# Altium PCB PIC16F_PCB.PcbDoc
Units mil, origin at the board's own origin, x right, y up, seen from the top; angles counter-clockwise.
Board outline 905 x 1620 mil, 2 copper layers (Top Layer, Bottom Layer); 8 components, 29 nets, 69 pads, 0 vias.
Unrouted connection lines stored in the file: 1.
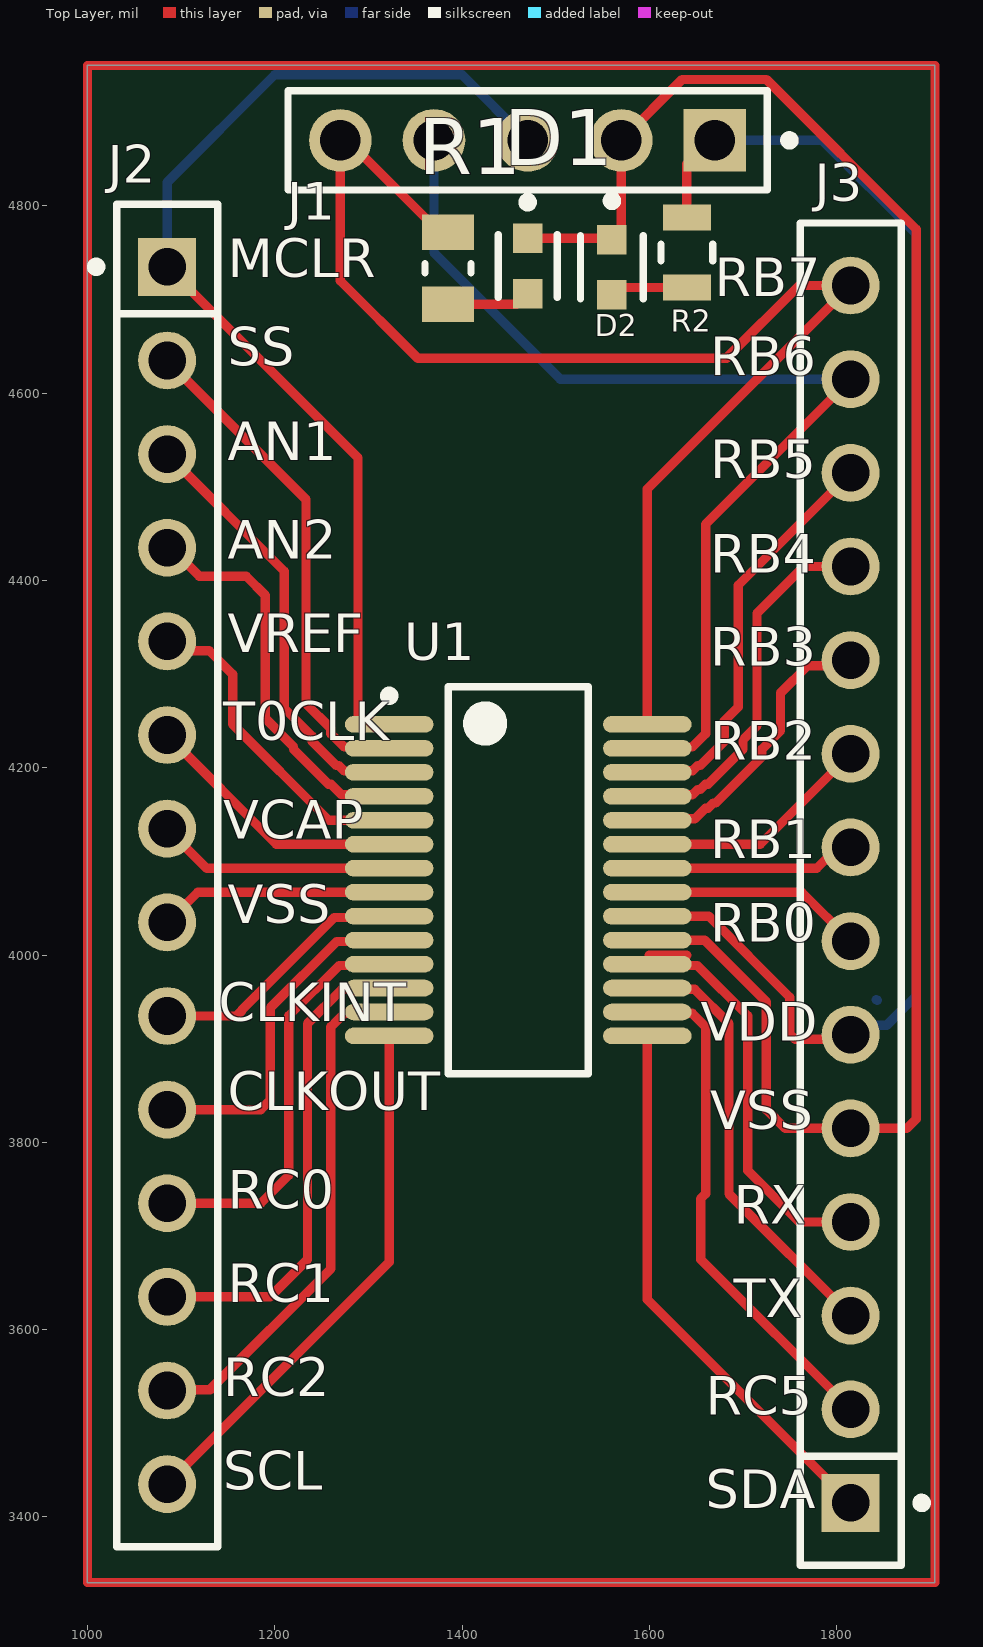
[diagram p0: Top Layer view]
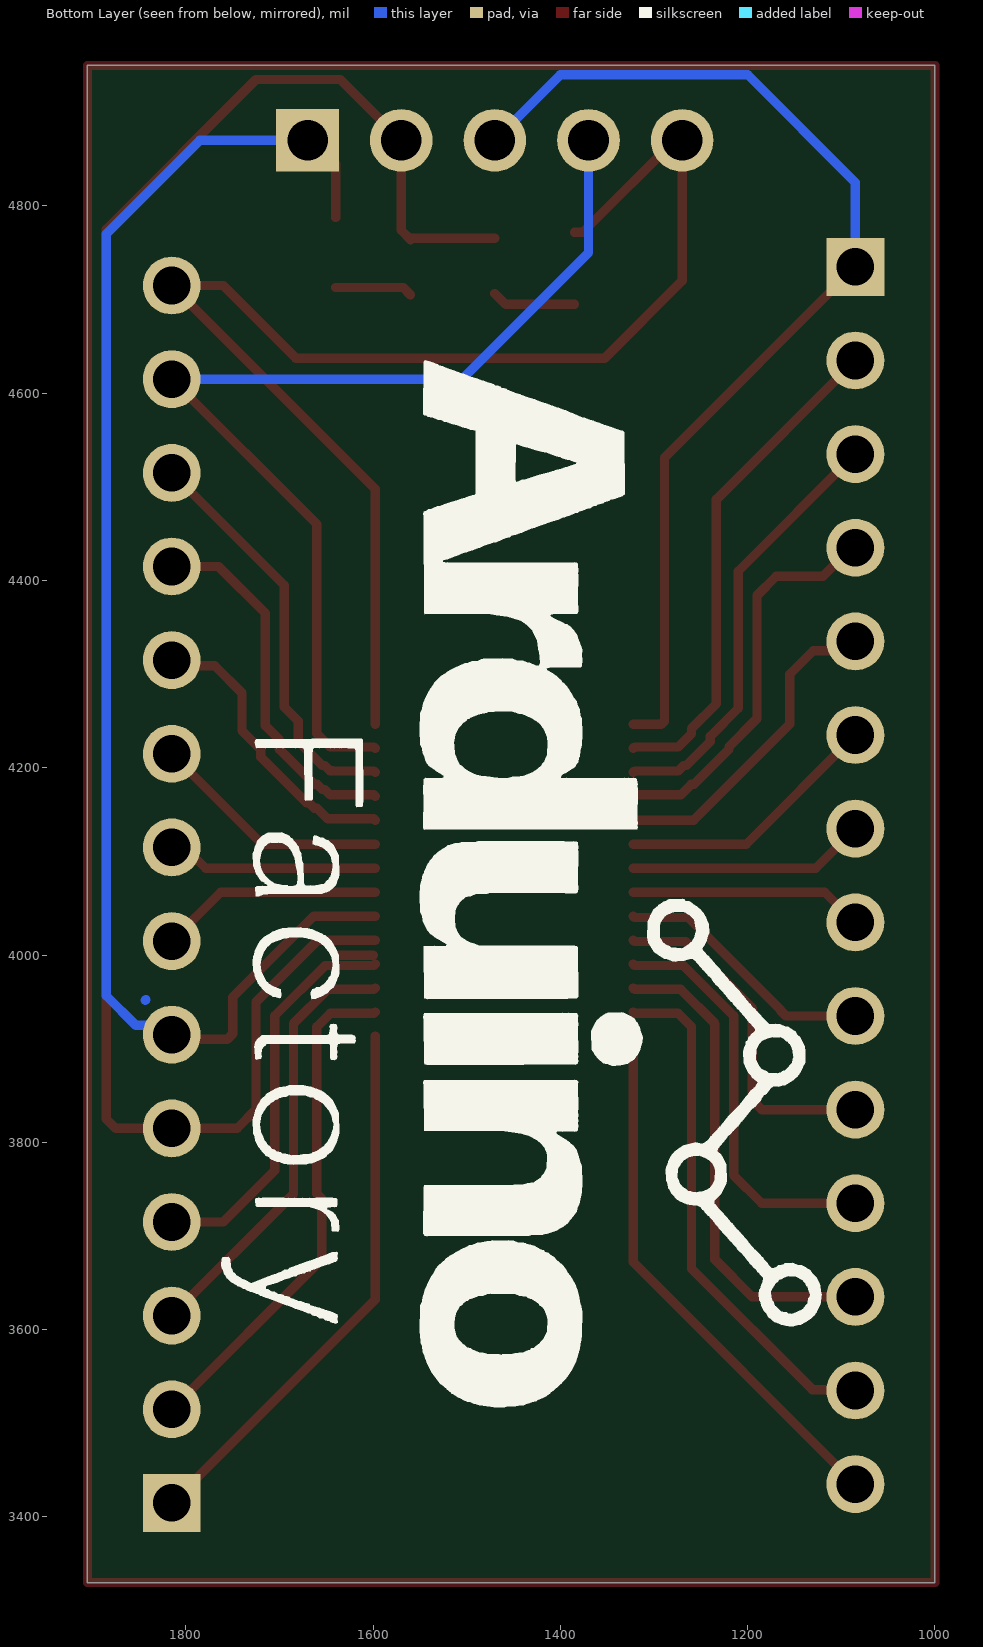
[diagram p1: Bottom Layer view, seen from below]
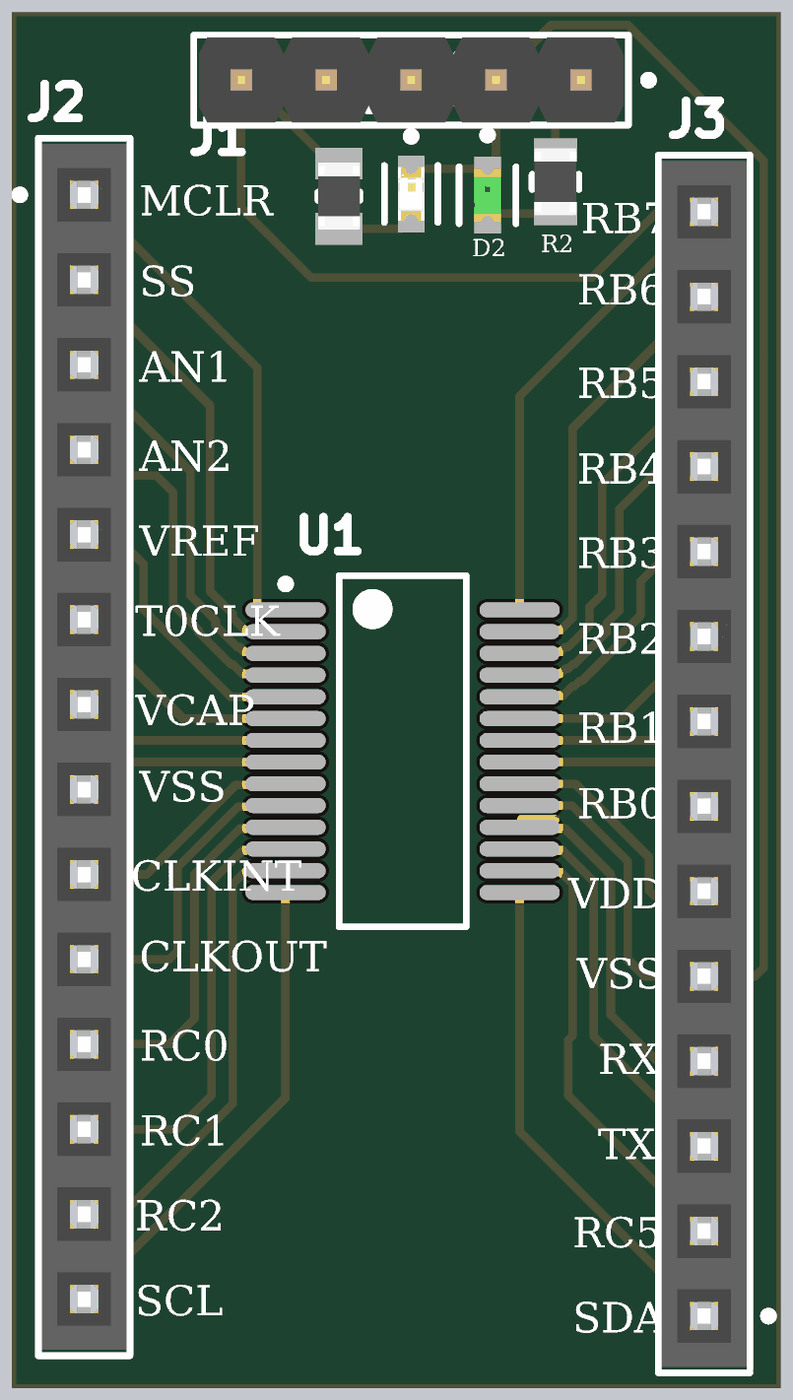
[diagram p2: 3D render of the assembled board from above, using the file's embedded part models]

## Layer stack, top to bottom
Top Solder: solder mask 0.4, Solder Resist, Dk 3.5
Top Layer: signal copper 1.4
Dielectric 1: dielectric 12.6, FR-4, Dk 4.8
Bottom Layer: signal copper 1.4
Bottom Solder: solder mask 0.4, Solder Resist, Dk 3.5

## Board outline
1000,3330 1000,4950 1905,4950 1905,3330

## Design rules (kind name [scope] priority, off if disabled: settings)
Clearance [All] p1: gap=10 ignorepadtopadclearanceinfootprint=FALSE
PolygonConnect [All] p1: connectstyle=Relief reliefconductorwidth=10 reliefentries=4 polygonreliefangle="90 Angle" airgapwidth=10
RoutingVias [All] p1: holewidth=28 width=50 viastyle="Through Hole" minholewidth=28 minwidth=50 maxholewidth=28 maxwidth=50
SolderMaskExpansion [All] p1: expansion=4 istentingtop=FALSE
Width [All] p1: maxlimit=10 minlimit=10 preferedwidth=10
30 further rules are at their usual default settings.

## Components (designator, comment, footprint, x,y, rotation, side; value= is the part's Value field where it differs from the comment)
D1 "LO_Q976-PS-25-0-20-R18" Osram_Opto_LO_Q976_MFG 1470,4736 r270 top
D2 "LTST-C190GKT" Lite-On_0_MFG 1560,4734.53 r270 top
J1 "61300511121" Wurth_61300511121_0 1470,4870 r180 top
J2 "PPTC141LFBN-RC" Sullins_0_MFG 1085,4085 r270 top
J3 "PPTC141LFBN-RC" Sullins_0_MFG 1815,4065 r90 top
R1 "RMCF0603FT220R" Yageo_RC0805_IPC_B 1385,4733.42 r270 top
R2 "RMCF0603FT220R" Yageo_RC0805_MFG 1640,4750.28 r90 top
U1 "PIC16F722AT-I/SS" MCHP-SSOP-SS28_M 1460,4080 r0 top

## Footprints (in the part's own frame and the unit in brackets; to place one, negate y for a bottom-side part, rotate by r counter-clockwise, add the part's x,y. Pads: shape width x height; smd on the part's side, far side on the other; paste and mask are expansions set on the pad)
Lite-On_0_MFG [mm]
  rect 0.8x0.8 smd paste+0 mask+0: 1(-0.75,0) 2(0.75,0)
  silkscreen extent -1.92,-0.85 0.85,0.85, body extent -1.25,-0.55 1.25,0.55, height 0.25
MCHP-SSOP-SS28_M [mm] "SOP, 28-Leads, Body 10.2x5.3mm, Pitch 0.65mm, IPC Low Density"
  oval 2.4x0.45 smd: 1(-3.5,4.225) 2(-3.5,3.575) 3(-3.5,2.925) 4(-3.5,2.275) 5(-3.5,1.625) 6(-3.5,0.975) 7(-3.5,0.325) 8(-3.5,-0.325) 9(-3.5,-0.975) 10(-3.5,-1.625) 11(-3.5,-2.275) 12(-3.5,-2.925) 13(-3.5,-3.575) 14(-3.5,-4.225) 15(3.5,-4.225) 16(3.5,-3.575) 17(3.5,-2.925) 18(3.5,-2.275) 19(3.5,-1.625) 20(3.5,-0.975) 21(3.5,-0.325) 22(3.5,0.325) 23(3.5,0.975) 24(3.5,1.625) 25(3.5,2.275) 26(3.5,2.925) 27(3.5,3.575) 28(3.5,4.225)
  silkscreen extent -3.62,-5.25 1.9,5.25, body extent -2.8,-5.25 2.8,5.25, height 2
Osram_Opto_LO_Q976_MFG [mm]
  rect 0.8x0.8 smd paste+0 mask+0: 1(-0.75,0) 2(0.75,0)
  silkscreen extent -1.85,-0.8 0.85,0.8, body extent -1.25,-0.52 1.25,0.52, height 0.25
Sullins_0_MFG [mm]
  rect 1.57x1.57 hole 1.02 paste-2539.97 mask+0: 1(-16.51,0)
  round 1.57 hole 1.02 paste-2539.97 mask+0: 2(-13.97,0) 3(-11.43,0) 4(-8.89,0) 5(-6.35,0) 6(-3.81,0) 7(-1.27,0) 8(1.27,0) 9(3.81,0) 10(6.35,0) 11(8.89,0) 12(11.43,0) 13(13.97,0) 14(16.51,0)
  silkscreen extent -18.21,-2.05 18.21,1.37, body extent -18.31,-1.47 18.31,1.47, height 0.25
Wurth_61300511121_0 [mm]
  rect 1.7x1.7 hole 1.1 paste-2539.97 mask+0: 1(-5.08,0)
  round 1.7 hole 1.1 paste-2539.97 mask+0: 2(-2.54,0) 3(0,0) 4(2.54,0) 5(5.08,0)
  silkscreen extent -7.23,-1.35 6.5,1.35, body extent -6.6,-1.45 6.6,1.45, height 0.25
Yageo_RC0805_IPC_B [mil]
  rect 37.66x55.44 smd paste+0 mask+0: 1(-38.42,0) 2(38.42,0)
  silkscreen extent -5,-25 5,25, body extent -67,-38 67,38, height 10
Yageo_RC0805_MFG [mm]
  rect 0.7x1.3 smd paste+0 mask+0: 1(-0.95,0) 2(0.95,0)
  silkscreen extent -0.23,-0.7 0.23,0.7, body extent -1.4,-0.8 1.4,0.8, height 0.25

## Part data
U1: "Flash Microcontroller with nanoWatt XLP Technology, 20 MHz, 24 I/O, -40 to 85 degC, 28-pin SSOP (SS28), Tape and Reel", Manufacturer=Microchip, Operation Voltage Range="1.8V - 5.5V", # of A/D Channels=11, ComponentLink1Description=Datasheet, ComponentLink1URL=http://ww1.microchip.com/downloads/en/DeviceDoc/41417B.pdf, ComponentLink2Description="Package Specification", ComponentLink2URL=http://www.microchip.com/stellent/groups/techpub_sg/documents/packagingspec/en012702.pdf, ComponentLink3Description="URL Link1", ComponentLink3URL="Product URL:http://www.microchip.com/datasheet/PIC16F722A", DatasheetVersion="Rev. B", Digital Communication="1 -A/E/USART, 1 -SSP(SPI/I2C)", I/O Pins=24, Internal Oscillator="16 MHz, 500 kHz", Max. CPU Speed MHz=20, Memory Type=Flash, Mounting Technology="Surface Mount", PackageDescription="28-Lead Plastic Shrink Small Outline, 10.2 x 5.3 mm Body, 0.65 mm Pitch", PackageReference=SSOP-SS28, PackageVersion="C04-073B, 12/2012", Packing=T/R, PartNumber=PIC16F722AT-I/SS, Program Memory KBytes=3.5, Program Memory KWords=2, RAM=128, RoHS=TRUE, Timers="2 - 8-bit, 1 - 16-bit, 0 - 32-bit"

## Nets (pads, with @x,y where several pads share a name; then routed paths per layer and width w, separated by ;. In a path a pad name is that pad's centre, name@x,y a point inside that pad or via, vN(x,y) a via of type N, cw(c..) or ccw(c..) an arc to the next point about the centre after c; other vN are vias at no path point)
\MCLR: J1.3 J2.1 U1.1 | length 1156
  Top Layer w10: J2.1 1288.82,4531.18 1288.82,4249.9 1292.38,4246.34 U1.1
  Bottom Layer w10: J2.1 1085,4825 1200,4940 1400,4940 J1.3
\SS: J2.2 U1.2 | length 539.8
  Top Layer w10: J2.2 1233.4,4486.6 1233.4,4268.4 1259.96,4241.84 1259.96,4236.46 1274.19,4222.22 1320.73,4222.22 U1.2
AN1: J2.3 U1.3 | length 466.9
  Top Layer w10: J2.3 1210,4410 1210,4263.52 1239.96,4233.56 1239.96,4228.17 1265.65,4202.48 1268.35,4202.48 1274.19,4196.63 1320.73,4196.63 U1.3
AN2: J2.4 U1.4 | length 425.8
  Top Layer w10: J2.4 1089.15,4435 1119.53,4404.61 1169.53,4404.61 1190,4384.14 1190,4252.54 1219.96,4222.58 1219.96,4219.89 1257.37,4182.48 1260.06,4182.48 1271.5,4171.04 1320.73,4171.04 U1.4
CLKIN: J2.9 U1.9 | length 281.9
  Top Layer w10: J2.9 1159.14,3935 1165,3940.86 1165,3941.72 1263.42,4040.14 1320.73,4040.14 U1.9
CLKOUT: J2.10 U1.10 | length 369.8
  Top Layer w10: J2.10 1185,3835 1195,3845 1195,3943.44 1266.11,4014.55 1320.73,4014.55 U1.10
NetD1_2: D1.2 R1.2 | length 89.8
  Top Layer w10: R1.2 1458.52,4695 D1.2
NetD2_2: D2.2 R2.1 | length 83.3
  Top Layer w10: D2.2 1567.87,4712.87 R2.1
RB0: J3.7 U1.21 | length 238.8
  Top Layer w10: U1.21 1762.8,4067.2 J3.7
RB1: J3.8 U1.22 | length 226.4
  Top Layer w10: U1.22 1778.78,4092.8 1800.98,4115 J3.8
RB2: J3.9 U1.23 | length 257.2
  Top Layer w10: U1.23 1718.39,4118.39 J3.9
RB3: J3.10 U1.24 | length 316.4
  Top Layer w10: U1.24 1599.27,4145.45 1648.5,4145.45 1659.94,4156.89 1662.63,4156.89 1668.22,4162.48 1670.92,4162.48 1720.04,4211.6 1720.04,4219.68 1740,4239.65 1740,4280 1769.09,4309.09 1809.09,4309.09 J3.10
RB4: J3.11 U1.25 | length 395.1
  Top Layer w10: U1.25 1599.27,4171.04 1645.81,4171.04 1651.65,4176.89 1654.35,4176.89 1659.94,4182.48 1662.63,4182.48 1700.04,4219.89 1700.04,4230.04 1715,4245 1715,4365 1765,4415 J3.11
RB5: J3.12 U1.26 | length 438.6
  Top Layer w10: U1.26 1599.27,4196.63 1643.11,4196.63 1643.37,4196.89 1646.06,4196.89 1651.65,4202.48 1654.35,4202.48 1680.04,4228.17 1680.04,4250.04 1695,4265 1695,4395 J3.12
RB6: J1.4 J3.13 U1.27 | length 1132.4
  Top Layer w10: U1.27 1599.27,4222.22 1645.81,4222.22 1660.04,4236.46 1660.04,4460.04 J3.13
  Bottom Layer w10: J1.4 1370,4750 1505,4615 J3.13
RB7: J1.5 J3.14 R1.1 U1.28 | length 1473.2
  Top Layer w10: J1.5 1270,4720 1352.5,4637.5 1682.5,4637.5 1760,4715 J3.14 1597.8,4497.8 U1.28 ; J1.5@1273.97,4873.97 1376.11,4771.84 R1.1
RC0: J2.11 U1.11 | length 442.7
  Top Layer w10: J2.11 1185,3735 1215,3765 1215,3935.15 1268.81,3988.96 1320.73,3988.96 U1.11
RC1: J2.12 U1.12 | length 521.4
  Top Layer w10: J2.12 1195,3635 1235,3675 1235,3926.87 1271.5,3963.37 1320.73,3963.37 U1.12
RC2: J2.13 U1.13 | length 556.1
  Top Layer w10: J2.13 1085.98,3535.98 1130.91,3535.98 1259.96,3665.04 1259.96,3923.54 1274.19,3937.78 1320.73,3937.78 U1.13
RC5: J3.2 U1.16 | length 545.7
  Top Layer w10: U1.16 1599.27,3937.78 1645.81,3937.78 1660.04,3923.54 1660.04,3745.04 1655,3740 1655,3675 J3.2
RX: J3.4 U1.18 | length 428
  Top Layer w10: U1.18 1599.27,3988.96 1651.19,3988.96 1705,3935.15 1705,3770 1760,3715 J3.4
SCL: J2.14 U1.14 | length 576.9
  Top Layer w10: J2.14 1322.2,3672.2 U1.14
SDA: J3.1 U1.15 | length 588.6
  Top Layer w10: U1.15 1597.8,3632.2 J3.1
T0CKI: J2.6 U1.6 | length 285.5
  Top Layer w10: J2.6 1201.61,4118.39 U1.6
TX: J3.3 U1.17 | length 468.6
  Top Layer w10: U1.17 1599.27,3963.37 1648.5,3963.37 1685,3926.87 1685,3745 J3.3
VCAP: J2.7 U1.7 | length 254.7
  Top Layer w10: J2.7 1127.2,4092.8 U1.7
VDD: J1.1 J3.6 R2.2 U1.20 | length 1553.5
  Top Layer w10: U1.20 1663.39,4041.61 1750,3955 1750,3915.86 1755.86,3910 1810,3910 J3.6 ; R2.2 1640,4845 J1.1@1670,4875
  Bottom Layer w10: J1.1 1785,4870 1885,4770 1885,3956.72 1853.2,3924.91 1824.91,3924.91 J3.6
VREF: J2.5 U1.5 | length 347.5
  Top Layer w10: J2.5 1094.91,4325.09 1129.91,4325.09 1155,4300 1155,4246.72 1257.74,4143.98 U1.5
VSS: D1.1 D2.1 J1.2 J2.8 J3.5 U1.8 U1.19 | length 2251.4
  Top Layer w10: J2.8 1085.51,4035 1117.72,4067.2 U1.8 ; D1.1 1558.52,4765.53 D2.1 1570,4774.06 J1.2 1635,4935 1725,4935 1885,4775 1885,3825 1875,3815 J3.5 1745,3815 1725,3835 1725,3950 1658.98,4016.02 U1.19
copper on no net: | length 5091.2
  Top Layer w10: 1600,4000 1640,4000 ; 1000,3330 1905,3330 1905,4950 1000,4950 1000,3330
  Bottom Layer w10: 1842.46,3952.46 1843.32,3951.6

## Other copper
Bottom Layer:

## Silkscreen, mask and mechanical layers (free items; w line width, h text height)
Top Overlay:
  text "MCLR" at 1150,4710.78 h70
  text "RB7" at 1670,4690 h70
  text "SS" at 1150,4615.78 h70
  text "RB6" at 1665,4605.91 h70
  text "AN1" at 1150,4515 h70
  text "RB5" at 1665,4495.91 h70
  text "AN2" at 1150,4410 h70
  text "RB4" at 1665,4395 h70
  text "VREF" at 1150,4310 h70
  text "RB3" at 1665,4295.91 h70
  text "T0CLK" at 1145,4215.91 h70
  text "RB2" at 1665,4195 h70
  text "VCAP" at 1145,4110.78 h70
  text "RB1" at 1665,4090 h70
  text "VSS" at 1150,4020.78 h70
  text "RB0" at 1665,4000.91 h70
  text "CLKINT" at 1140,3915.78 h70
  text "VDD" at 1655,3895 h70
  text "CLKOUT" at 1150,3820.91 h70
  text "VSS" at 1665,3800.78 h70
  text "RC0" at 1150,3715.91 h70
  text "RX" at 1690,3700 h70
  text "RC1" at 1150,3615.78 h70
  text "TX" at 1690,3600 h70
  text "RC2" at 1145,3515.78 h70
  text "RC5" at 1660,3495.91 h70
  text "SCL" at 1145,3415.78 h70
  text "SDA" at 1660,3395.78 h70
Bottom Overlay:
  drawing of 14 lines, arcs and shapes, not listed